# EAGLE board cerewet (EAGLE 7.2.0)
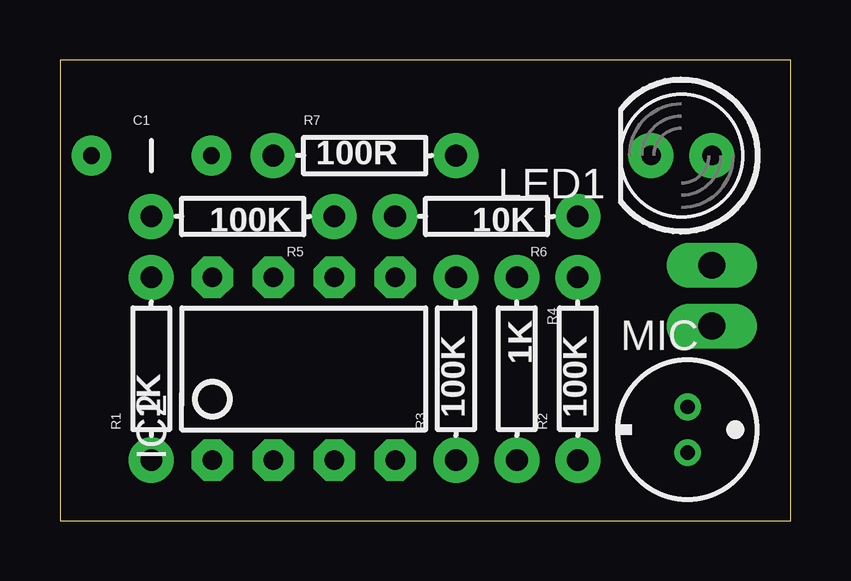
[diagram p0: board, top side]
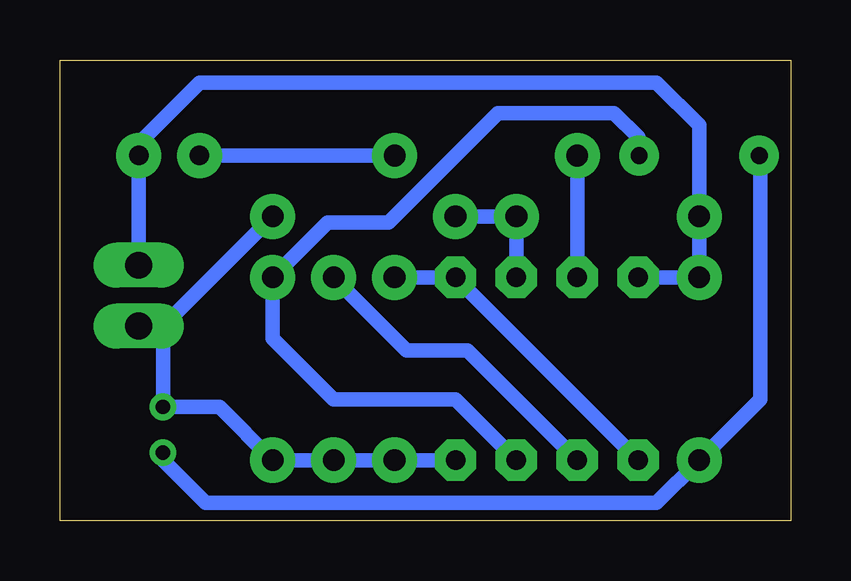
[diagram p1: board, bottom side, seen from below]

Size 30.46 x 19.23 mm. Coordinates in mm from the lower left corner, seen from the top.
Outline: 0,0 30.46,0 30.46,19.23 0,19.23 0,0
Copper layers (1*16): Top 0.035mm / dielectric 1.5mm / Bottom 0.035mm
Design rules "default": minimum track width 10mil, minimum drill 24mil, track to track 8mil, track to pad 8mil, pad to pad 8mil, via to via 8mil, smd to smd 8mil, copper to edge 40mil, drill to drill 8mil, minimum pad ring 10mil, minimum via ring 8mil, stop-mask expansion 4mil, vias tented up to drill 0mil, thermal gap 10mil

## Footprints (pad centres in the part's own frame; a part is rotated, then mirrored left to right if it is on the bottom)
CAP-PTH-5MM = drill 0.7 pad 1.651: 1 -2.5,0; 2 2.5,0
DIP08 = drill 0.813 pad 1.727 octagon: 1 -3.81,-3.81; 2 -1.27,-3.81; 3 1.27,-3.81; 4 3.81,-3.81; 5 3.81,3.81; 6 1.27,3.81; 7 -1.27,3.81; 8 -3.81,3.81
1X02_LONGPADS = drill 1.118 pad 1.88 long: 1 0,0; 2 2.54,0
LED5MM = drill 0.813 pad 1.88: A -1.27,0; K 1.27,0
WM-61B = drill 0.6 pad 1: 1 0,0.95; 2 0,-0.95
AXIAL-0.3EZ = drill 0.9 pad 1.88: P$1 -3.81,0; P$2 3.81,0

## Placement (x,y rotation side)
C1  0.1uF  [CAP-PTH-5MM]  3.81,15.24 0 top
IC2  LM358  [DIP08]  10.16,6.35 0 top
JP1  PWR  [1X02_LONGPADS]  27.18,10.67 270 top
LED1  [LED5MM]  25.91,15.24 180 top
MIC  [WM-61B]  26.16,3.81 0 top
R1  1K  [AXIAL-0.3EZ]  3.81,6.35 90 top
R2  100K  [AXIAL-0.3EZ]  21.59,6.35 90 top
R3  100K  [AXIAL-0.3EZ]  16.51,6.35 90 top
R4  1K  [AXIAL-0.3EZ]  19.05,6.35 270 top
R5  100K  [AXIAL-0.3EZ]  7.62,12.7 180 top
R6  10K  [AXIAL-0.3EZ]  17.78,12.7 180 top
R7  100R  [AXIAL-0.3EZ]  12.7,15.24 0 top

## Library data of the parts
C1 R1-R7 = SparkFun-Passives
IC2 = SparkFun-AnalogIC; PROD_ID: IC-09172
JP1 = SparkFun-Connectors
LED1 = SparkFun-LED
MIC = microphon

## Nets
GND: IC2.4 JP1.2 MIC.1 R2.P$1 R3.P$1 R4.P$2 R6.P$1
N$1: C1.1 MIC.2 R1.P$1
N$2: C1.2 IC2.3 R2.P$2
N$3: IC2.2 R4.P$1
N$4: IC2.1 IC2.5 R3.P$2
N$5: IC2.6 R5.P$1 R6.P$2
N$6: IC2.7 R7.P$1
N$7: LED1.K R7.P$2
VCC: IC2.8 JP1.1 LED1.A R1.P$2 R5.P$2

## Tracks (layer width: path | path; a pad name or v marks a point on that pad's centre or on a via)
GND
  Bottom 0.61: IC2.4 R3.P$1 R4.P$2 R2.P$1 23.81,4.76 MIC.1 26.16,7.62 26.67,8.13 | JP1.2 26.67,8.13 | 26.67,8.13 26.16,8.13 R6.P$1
N$1
  Bottom 0.61: C1.1 1.27,15.2 1.27,5.08 R1.P$1 5.59,0.76 24.38,0.76 26.16,2.54 MIC.2
N$2
  Bottom 0.61: C1.2 6.35,16 7.37,17.02 12.19,17.02 16.76,12.45 19.3,12.45 R2.P$2 21.59,7.62 19.05,5.08 13.97,5.08 IC2.3
N$3
  Bottom 0.61: IC2.2 13.46,7.11 16,7.11 R4.P$1
N$4
  Bottom 0.61: R3.P$2 IC2.5 IC2.1
N$5
  Bottom 0.61: IC2.6 R5.P$1 R6.P$2
N$6
  Bottom 0.61: IC2.7 R7.P$1
N$7
  Bottom 0.61: LED1.K R7.P$2
VCC
  Bottom 0.61: IC2.8 R1.P$2 R5.P$2 3.81,16.51 5.59,18.29 24.64,18.29 27.18,15.75 LED1.A | 26.92,15.49 LED1.A | JP1.1 LED1.A